# EAGLE board eagle achema (EAGLE 7.6.0)

Size 73.58 x 63.39 mm. Coordinates in mm from the lower left corner, seen from the top.
Outline: 0,0 56.82,0 56.82,53.33 0,53.33 0,0
Copper layers (1*16): Top 0.035mm / dielectric 1.5mm / Bottom 0.035mm
Design rules "default": minimum track width 10mil, minimum drill 24mil, track to track 8mil, track to pad 8mil, pad to pad 8mil, via to via 8mil, smd to smd 8mil, copper to edge 40mil, drill to drill 8mil, minimum pad ring 10mil, minimum via ring 8mil, stop-mask expansion 4mil, vias tented up to drill 0mil, thermal gap 10mil

## Footprints (pad centres in the part's own frame; a part is rotated, then mirrored left to right if it is on the bottom)
DC-POWER = drill 0.889 pad 2.54 octagon: + 0,2.54; - 0,-2.54
C5B2.5 = drill 0.813 pad 1.6 octagon: 1 -2.54,0; 2 2.54,0
D-7.5 = drill 0.813 long: A 3.81,0; C -3.81,0
LED5MM = drill 0.813 octagon: A -1.27,0; K 1.27,0
2P-2.54-65/35MIL = drill 0.889 pad 1.651 square: 1 0,1.27 | drill 0.889 pad 1.651: 2 0,-1.27
PIEZO-22MM = drill 1 pad 2.54: P$1 -5,0; P$2 5,0
0207/10 = drill 0.813 octagon: 1 -5.08,0; 2 5.08,0
PHOTORESISTOR-2.54 = drill 1 pad 1.5: P$1 -1.27,0; P$2 1.27,0
B25V = drill 0.813 long: A 2.54,0.635; E -2.54,0.635; S 0,0.635
TL1105 = drill 1 pad 1.676: 1 -2.25,3.25; 2 2.25,3.25; 3 -2.25,-3.25; 4 2.25,-3.25
ARDUINO_UNO = drill 1.016 pad 1.88: 0 63.5,50.8; 1 60.96,50.8; 2 58.42,50.8; 3 55.88,50.8; 3.3V 35.56,2.54; 4 53.34,50.8; 5 50.8,50.8; 5V 38.1,2.54; 6 48.26,50.8; 7 45.72,50.8; 8 41.656,50.8; 9 39.116,50.8; 10 36.576,50.8; 11 34.036,50.8; 12 31.496,50.8; 13 28.956,50.8; A0 50.8,2.54; A1 53.34,2.54; A2 55.88,2.54; A3 58.42,2.54; A4 60.96,2.54; A5 63.5,2.54; AREF 23.876,50.8; GND 26.416,50.8; GND. 43.18,2.54; GND.. 40.64,2.54; I/OREF 30.48,2.54; N/C 27.94,2.54; RESET 33.02,2.54; SCL 18.796,50.8; SDA 21.336,50.8; VIN 45.72,2.54 | hole 3.2: 66.04,7.62; 66.04,35.56; 15.24,50.8; 13.97,2.54
1X16P-2.54-2.54-11.6-3.0-BLACK-MALE = drill 0.889 pad 1.651 square: 1 0,19.05 | drill 0.889 pad 1.651: 2 0,16.51; 3 0,13.97; 4 0,11.43; 5 0,8.89; 6 0,6.35; 7 0,3.81; 8 0,1.27; 9 0,-1.27; 10 0,-3.81; 11 0,-6.35; 12 0,-8.89; 13 0,-11.43; 14 0,-13.97; 15 0,-16.51; 16 0,-19.05
DIL16 = drill 0.813 long: 1 -8.89,-3.81; 2 -6.35,-3.81; 3 -3.81,-3.81; 4 -1.27,-3.81; 5 1.27,-3.81; 6 3.81,-3.81; 7 6.35,-3.81; 8 8.89,-3.81; 9 8.89,3.81; 10 6.35,3.81; 11 3.81,3.81; 12 1.27,3.81; 13 -1.27,3.81; 14 -3.81,3.81; 15 -6.35,3.81; 16 -8.89,3.81
TO92 = drill 0.813 octagon: 1 1.27,0; 2 0,1.905; 3 -1.27,0
1X3P-2.54-2.54-11.6-3.0-BLACK-MALE = drill 0.889 pad 1.651 square: 1 0,2.54 | drill 0.889 pad 1.651: 2 0,0; 3 0,-2.54

## Placement (x,y rotation side)
BAT3  [DC-POWER]  5,289.48 0 top  (outside the outline)
CTermistore  100nF  [C5B2.5]  5,73.58 0 top  (outside the outline)
D1  [D-7.5]  5,340.28 0 top  (outside the outline)
D2  [LED5MM]  5,365.68 0 top  (outside the outline)
M1  [2P-2.54-65/35MIL]  5,327.58 0 top  (outside the outline)
PIEZO1  [PIEZO-22MM]  5,352.98 0 top  (outside the outline)
R1  220‎Ω  [0207/10]  5,48.18 0 top
R2  [PHOTORESISTOR-2.54]  5,86.28 0 top  (outside the outline)
R3  1k‎Ω  [0207/10]  5,98.98 0 top  (outside the outline)
R4  1k‎Ω  [0207/10]  5,111.68 0 top  (outside the outline)
R5  1k‎Ω  [0207/10]  5,200.58 0 top  (outside the outline)
R6  1M‎Ω  [0207/10]  5,213.28 0 top  (outside the outline)
R7  4700‎Ω  [0207/10]  5,225.98 0 top  (outside the outline)
R8  4700‎Ω  [0207/10]  5,238.68 0 top  (outside the outline)
R9  4700‎Ω  [0207/10]  5,251.38 0 top  (outside the outline)
R10  4700‎Ω  [0207/10]  5,264.08 0 top  (outside the outline)
R11  100‎Ω  [0207/10]  5,378.38 0 top  (outside the outline)
R12  4700‎Ω  [0207/10]  5,276.78 0 top  (outside the outline)
R13  100‎Ω  [0207/10]  5,391.08 0 top  (outside the outline)
Rpot1  250k‎Ω  [B25V]  5,35.48 0 top
Rpot4  250k‎Ω  [B25V]  5,314.88 0 top  (outside the outline)
S1  [TL1105]  5,137.08 0 top  (outside the outline)
S3  [TL1105]  5,149.78 0 top  (outside the outline)
S4  [TL1105]  5,162.48 0 top  (outside the outline)
S5  [TL1105]  5,175.18 0 top  (outside the outline)
S6  [TL1105]  5,187.88 0 top  (outside the outline)
U1  [ARDUINO_UNO]  5,10.08 0 top
U2  [1X16P-2.54-2.54-11.6-3.0-BLACK-MALE]  5,22.78 0 top
U3  [DIL16]  5,60.88 0 top
U4  [TO92]  5,124.38 0 top  (outside the outline)
U6  [1X3P-2.54-2.54-11.6-3.0-BLACK-MALE]  5,302.18 0 top  (outside the outline)

## Library data of the parts
BAT3 CTermistore D1 D2 M1 PIEZO1 R1-R13 Rpot1 Rpot4 S1 S3-S6 U1-U4 U6 = AUTODESK_CIRCUITS_BREADBOARD

## Nets
N$1: Rpot1.S U2.3
N$2: R1.2 U2.15
N$3: R2.P$1 R3.2
N$4: CTermistore.1 R1.1 R2.P$2 Rpot1.A Rpot4.A S1.3 U1.5V U1.A0 U2.2 U3.8 U4.2 U6.2
N$5: S1.2
N$6: R10.2 R12.1 S4.1
N$7: R6.1 S3.4 S4.4 S5.4 S6.4 U1.A2
N$8: R7.2 R8.2 S3.1
N$9: R8.1 R9.1 S6.1
N$10: R9.2 R10.1 S5.1
N$11: S3.2
N$12: S3.3
N$13: S6.2
N$14: S6.3
N$15: S5.2
N$16: S5.3
N$17: S4.2
N$18: S4.3
N$19: R6.2 R7.1
N$20: U1.9 U4.3
N$21: R12.2
N$22: R5.2 S1.4 U1.8
N$23: S1.1
N$24: U1.10 U6.1
N$25: Rpot4.S U1.A1
N$26: CTermistore.2 R4.2 U1.A3
N$27: U1.7 U2.4
N$28: U1.6 U2.6
N$29: U1.4 U2.12
N$30: U1.3 U2.13
N$31: U1.2 U2.14
N$32: U1.5 U2.11
N$33: U1.11 U3.1
N$34: U1.12 U3.2
N$35: D1.C M1.2 U3.3
N$36: D1.A M1.1 U3.6
N$37: U1.13 U3.7
N$38: U3.9
N$39: U3.10
N$40: U3.11
N$41: BAT3.- R3.1 R4.1 R5.1 Rpot1.E Rpot4.E U1.GND.. U2.1 U2.5 U2.16 U3.4 U3.5 U3.12 U3.13 U4.1 U6.3
N$42: U3.14
N$43: U3.15
N$44: BAT3.+ U3.16
N$45: PIEZO1.P$1 R11.2
N$46: D2.K PIEZO1.P$2 U1.GND.
N$47: D2.A R13.2
N$48: R11.1 U1.A5
N$49: R13.1 U1.A4

## Tracks (layer width: path | path; a pad name or v marks a point on that pad's centre or on a via)
N$1  (1 unrouted)
N$2  (1 unrouted)
N$3  (1 unrouted)
N$4  (11 unrouted)
N$6  (2 unrouted)
N$7  (5 unrouted)
N$8  (2 unrouted)
N$9  (2 unrouted)
N$10  (2 unrouted)
N$19  (1 unrouted)
N$20  (1 unrouted)
N$22  (2 unrouted)
N$24  (1 unrouted)
N$25  (1 unrouted)
N$26  (2 unrouted)
N$27  (1 unrouted)
N$28  (1 unrouted)
N$29  (1 unrouted)
N$30  (1 unrouted)
N$31  (1 unrouted)
N$32  (1 unrouted)
N$33  (1 unrouted)
N$34  (1 unrouted)
N$35  (2 unrouted)
N$36  (2 unrouted)
N$37  (1 unrouted)
N$41  (15 unrouted)
N$44  (1 unrouted)
N$45  (1 unrouted)
N$46  (2 unrouted)
N$47  (1 unrouted)
N$48  (1 unrouted)
N$49  (1 unrouted)